# EAGLE board Arduino Mega (EAGLE 7.6.0)

Size 101.6 x 53.34 mm. Coordinates in mm from the lower left corner, seen from the top.
Copper layers (1*16): Top 0.035mm / dielectric 1.5mm / Bottom 0.035mm
Design rules "default": minimum track width 10mil, minimum drill 24mil, track to track 8mil, track to pad 8mil, pad to pad 8mil, via to via 8mil, smd to smd 8mil, copper to edge 40mil, drill to drill 8mil, minimum pad ring 10mil, minimum via ring 8mil, stop-mask expansion 4mil, vias tented up to drill 0mil, thermal gap 10mil

## Footprints (pad centres in the part's own frame; a part is rotated, then mirrored left to right if it is on the bottom)
ARDUINO_MEGA = smd 0.711 x 1.422 bottom: 0@1 63.5,48.5; 1@1 60.96,48.5; 2@1 58.42,48.5; 3@1 55.88,48.5; 3V3@1 35.56,4.713; 4@1 53.34,48.5; 5@1 50.8,48.5; 5V@1 38.1,4.713; 6@1 48.26,48.5; 7@1 45.72,48.5; 8@1 41.656,48.5; 9@1 39.116,48.5; 10@1 36.576,48.5; 11@1 34.036,48.5; 12@1 31.496,48.5; 13@1 28.956,48.5; 14@1 68.58,48.5; 15@1 71.12,48.5; 16@1 73.66,48.5; 17@1 76.2,48.5; 18@1 78.74,48.5; 19@1 81.28,48.5; 20@1 83.82,48.5; 21@1 86.36,48.5; A0@1 50.8,4.713; A1@1 53.34,4.713; A2@1 55.88,4.713; A3@1 58.42,4.713; A4@1 60.96,4.713; A5@1 63.5,4.713; A6@1 66.04,4.713; A7@1 68.58,4.713; A8@1 73.66,4.713; A9@1 76.2,4.713; A10@1 78.74,4.713; A11@1 81.28,4.713; A12@1 83.82,4.713; A13@1 86.36,4.713; A14@1 88.9,4.713; A15@1 91.44,4.713; AREF@1 23.876,48.5; GND 26.416,48.5; GND@7 40.64,4.713; GND@8 43.18,4.713; I/OREF@1 30.48,4.713; N/C@1 27.94,4.713; RESET@1 33.02,4.713; SCL1@1 18.796,48.5; SDA1@1 21.336,48.5; VIN@1 45.72,4.713 | smd 0.711 x 1.422: 0@2 63.5,48.5; 1@2 60.96,48.5; 2@2 58.42,48.5; 3@2 55.88,48.5; 3V3@2 35.56,4.713; 4@2 53.34,48.5; 5@2 50.8,48.5; 5V@2 38.1,4.713; 6@2 48.26,48.5; 7@2 45.72,48.5; 8@2 41.656,48.5; 9@2 39.116,48.5; 10@2 36.576,48.5; 11@2 34.036,48.5; 12@2 31.496,48.5; 13@2 28.956,48.5; 14@2 68.58,48.5; 15@2 71.12,48.5; 16@2 73.66,48.5; 17@2 76.2,48.5; 18@2 78.74,48.5; 19@2 81.28,48.5; 20@2 83.82,48.5; 21@2 86.36,48.5; A0@2 50.8,4.713; A1@2 53.34,4.713; A2@2 55.88,4.713; A3@2 58.42,4.713; A4@2 60.96,4.713; A5@2 63.5,4.713; A6@2 66.04,4.713; A7@2 68.58,4.713; A8@2 73.66,4.713; A9@2 76.2,4.713; A10@2 78.74,4.713; A11@2 81.28,4.713; A12@2 83.82,4.713; A13@2 86.36,4.713; A14@2 88.9,4.713; A15@2 91.44,4.713; AREF@2 23.876,48.5; GND1 26.416,48.5; GND@10 40.64,4.713; GND@11 43.18,4.713; I/OREF@2 30.48,4.713; N/C@2 27.94,4.713; RESET@2 33.02,4.713; SCL1@2 18.796,48.5; SDA1@2 21.336,48.5; VIN@2 45.72,4.713 | smd 1.422 x 0.711 bottom: 5V.@1 91.669,48.768; 22@1 91.669,47.625; 23@1 91.669,46.355; 24@1 91.669,45.085; 25@1 91.669,43.815; 26@1 91.669,42.545; 27@1 91.669,41.275; 28@1 91.669,40.005; 29@1 91.669,38.735; 30@1 91.669,37.465; 31@1 91.669,36.195; 32@1 91.669,34.925; 33@1 91.669,33.655; 34@1 91.669,32.385; 35@1 91.669,31.115; 36@1 91.669,29.845; 37@1 91.669,28.575; 38@1 91.669,27.305; 39@1 91.669,26.035; 40@1 91.669,24.765; 41@1 91.669,23.495; 42@1 91.669,22.225; 43@1 91.669,20.955; 44@1 91.669,19.685; 45@1 91.669,18.415; 46@1 91.669,17.145; 47@1 91.669,15.875; 48@1 91.669,14.605; 49@1 91.669,13.335; 50@1 91.669,12.065; 51@1 91.669,10.795; 52@1 91.669,9.525; 53@1 91.669,8.255; GND@4 91.669,6.985 | smd 1.422 x 0.711: 5V.@3 91.669,48.768; 22@2 91.669,47.625; 23@2 91.669,46.355; 24@2 91.669,45.085; 25@2 91.669,43.815; 26@2 91.669,42.545; 27@2 91.669,41.275; 28@2 91.669,40.005; 29@2 91.669,38.735; 30@2 91.669,37.465; 31@2 91.669,36.195; 32@2 91.669,34.925; 33@2 91.669,33.655; 34@2 91.669,32.385; 35@2 91.669,31.115; 36@2 91.669,29.845; 37@2 91.669,28.575; 38@2 91.669,27.305; 39@2 91.669,26.035; 40@2 91.669,24.765; 41@2 91.669,23.495; 42@2 91.669,22.225; 43@2 91.669,20.955; 44@2 91.669,19.685; 45@2 91.669,18.415; 46@2 91.669,17.145; 47@2 91.669,15.875; 48@2 91.669,14.605; 49@2 91.669,13.335; 50@2 91.669,12.065; 51@2 91.669,10.795; 52@2 91.669,9.525; 53@2 91.669,8.255; GND@9 91.669,6.985 | hole 3.2: 15.24,50.8; 13.97,2.54; 90.17,50.8; 96.52,2.54

## Placement (x,y rotation side)
E$1  [ARDUINO_MEGA]  0,0 0 top

## Library data of the parts
E$1 = voltera_community_lib